# EAGLE board SparkFun-74HC4051-8-Channel-Mux-Breakout_Panel_v10 (EAGLE 7.5.0), part 1 of 6
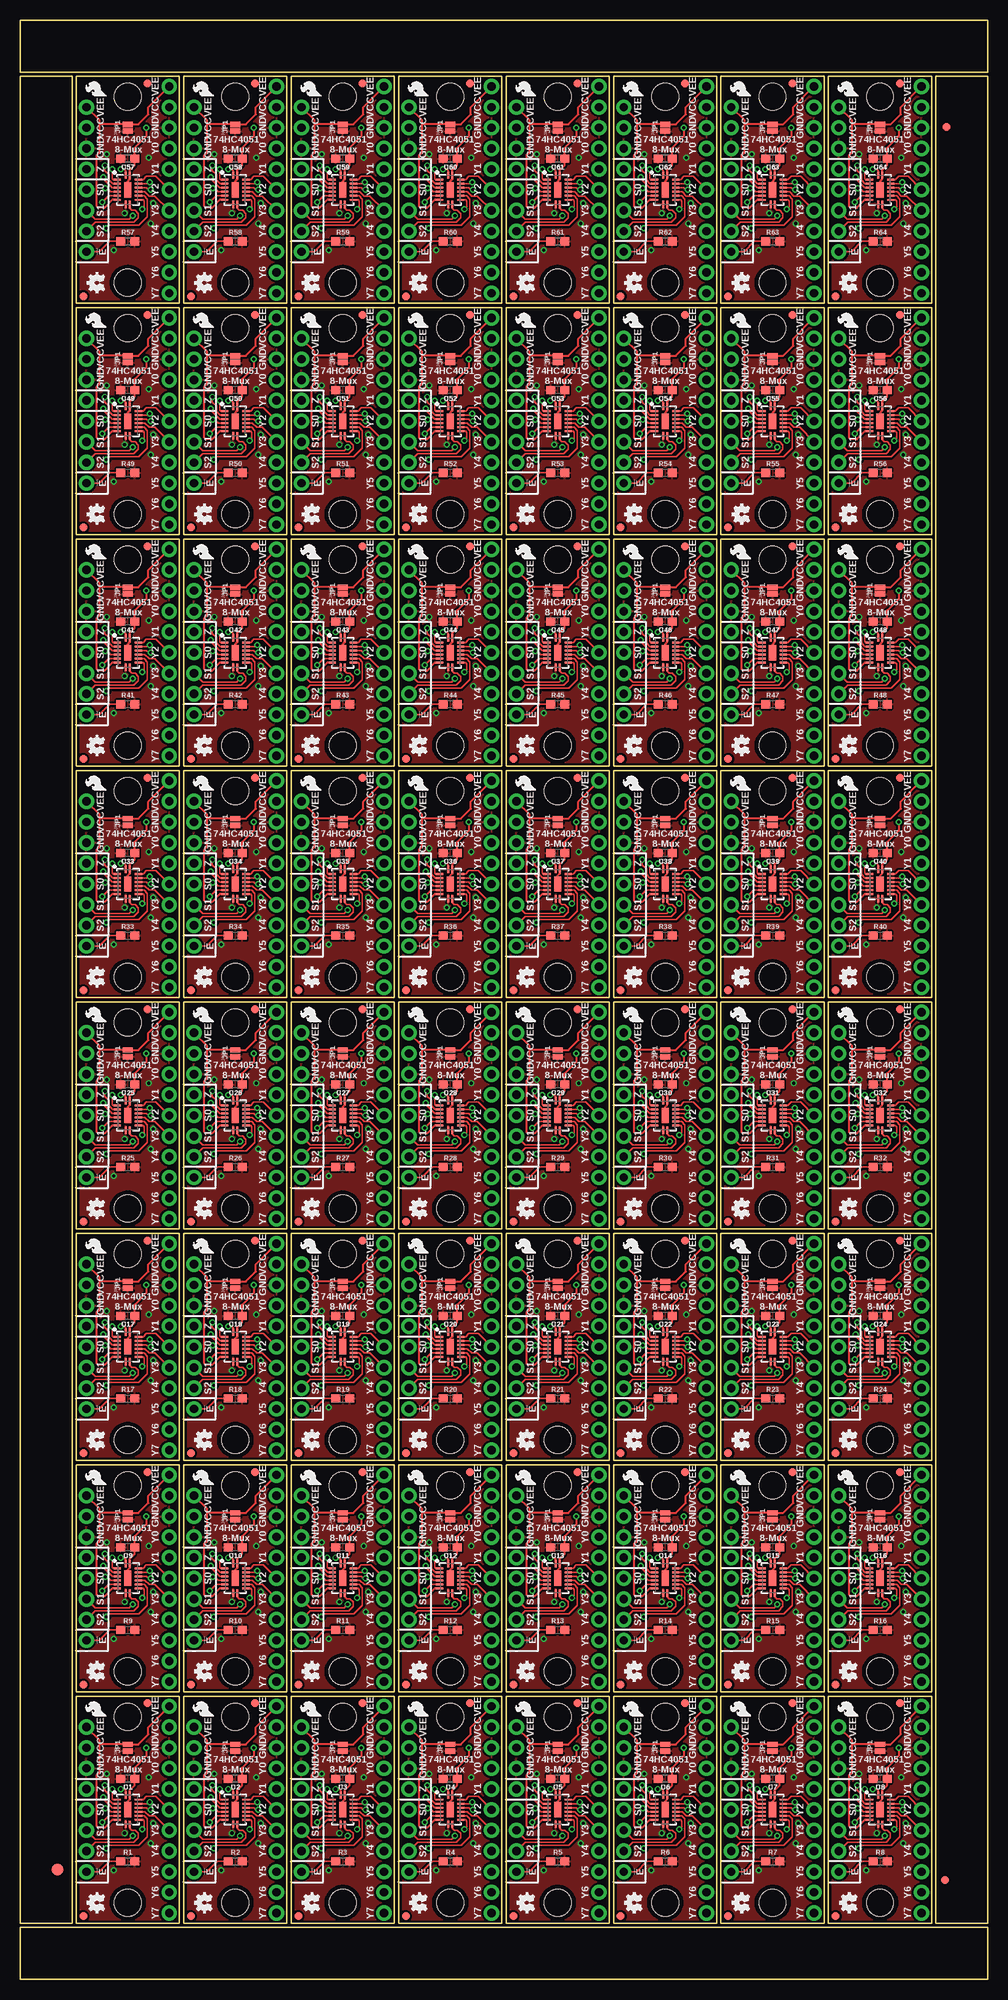
[diagram p0: board, top side]
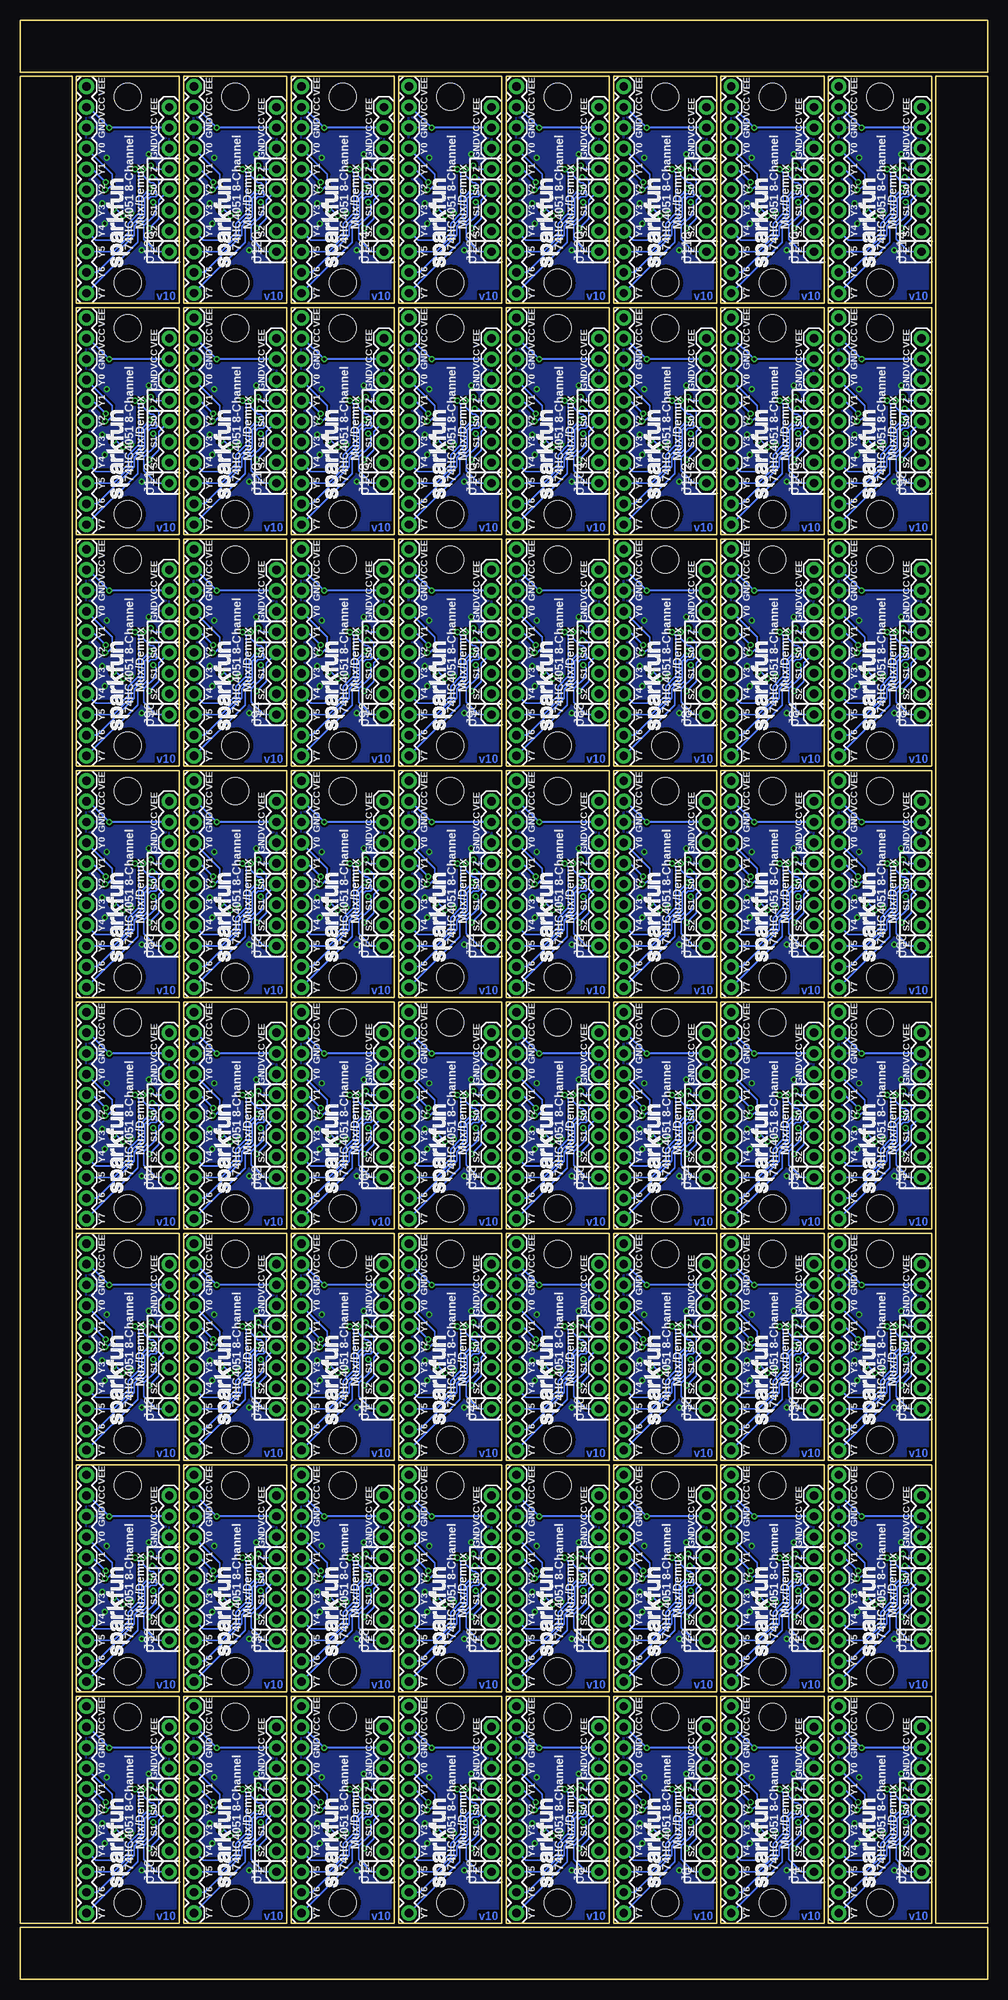
[diagram p1: board, bottom side, seen from below]

Size 118.87 x 240.79 mm. Coordinates in mm from the lower left corner, seen from the top.
Outline: 280 segments
Copper layers (1*16): Top 0.035mm / dielectric 1.5mm / Bottom 0.035mm
Design rules "SparkFun-2-layer-TIGHT": minimum track width 7mil, minimum drill 15mil, track to track 7mil, track to pad 7mil, pad to pad 7mil, via to via 7mil, smd to smd 7mil, copper to edge 7mil, drill to drill 7mil, minimum pad ring 7mil, minimum via ring 7mil, stop-mask expansion 4mil, vias tented up to drill 25mil, thermal gap 10mil

## Footprints (pad centres in the part's own frame; a part is rotated, then mirrored left to right if it is on the bottom)
0603 = smd 1.1 x 1: 1 -0.85,0; 2 0.85,0
FIDUCIAL-1.5X3 = smd 1.5 x 1.5: 1 0,0
FIDUCIAL-1X2 = smd 1 x 1: 1 0,0
STAND-OFF = hole 3.302: 0,0
1X11 = drill 1.016 pad 1.88: 1 0,0; 2 2.54,0; 3 5.08,0; 4 7.62,0; 5 10.16,0; 6 12.7,0; 7 15.24,0; 8 17.78,0; 9 20.32,0; 10 22.86,0; 11 25.4,0
1X08_ROUND = drill 1.016 pad 1.88: 1 0,0; 2 2.54,0; 3 5.08,0; 4 7.62,0; 5 10.16,0; 6 12.7,0; 7 15.24,0; 8 17.78,0
PAD-JUMPER-2-NC_BY_PASTE_NO_SILK = smd 0.635 x 1.27: 1 -0.401,0; 2 0.413,0
DHVQFN-16-2.5X3.5MM = smd 0.9 x 0.24: 1 -1.8,-0.25; 8 1.8,-0.25; 9 1.8,0.25; 16 -1.8,0.25 | smd 0.24 x 0.9: 2 -1.25,-1.3; 3 -0.75,-1.3; 4 -0.25,-1.3; 5 0.25,-1.3; 6 0.75,-1.3; 7 1.25,-1.3; 10 1.25,1.3; 11 0.75,1.3; 12 0.25,1.3; 13 -0.25,1.3; 14 -0.75,1.3; 15 -1.25,1.3 | smd 1.9 x 0.9: EP 0,0

## Placement (x,y rotation side)
C1  0.1uF  [0603]  13.21,24.64 180 top
C2  0.1uF  [0603]  26.42,24.64 180 top
C3  0.1uF  [0603]  39.62,24.64 180 top
C4  0.1uF  [0603]  52.83,24.64 180 top
C5  0.1uF  [0603]  66.04,24.64 180 top
C6  0.1uF  [0603]  79.25,24.64 180 top
C7  0.1uF  [0603]  92.46,24.64 180 top
C8  0.1uF  [0603]  105.66,24.64 180 top
C9  0.1uF  [0603]  13.21,53.09 180 top
C10  0.1uF  [0603]  26.42,53.09 180 top
C11  0.1uF  [0603]  39.62,53.09 180 top
C12  0.1uF  [0603]  52.83,53.09 180 top
C13  0.1uF  [0603]  66.04,53.09 180 top
C14  0.1uF  [0603]  79.25,53.09 180 top
C15  0.1uF  [0603]  92.46,53.09 180 top
C16  0.1uF  [0603]  105.66,53.09 180 top
C17  0.1uF  [0603]  13.21,81.53 180 top
C18  0.1uF  [0603]  26.42,81.53 180 top
C19  0.1uF  [0603]  39.62,81.53 180 top
C20  0.1uF  [0603]  52.83,81.53 180 top
C21  0.1uF  [0603]  66.04,81.53 180 top
C22  0.1uF  [0603]  79.25,81.53 180 top
C23  0.1uF  [0603]  92.46,81.53 180 top
C24  0.1uF  [0603]  105.66,81.53 180 top
C25  0.1uF  [0603]  13.21,109.98 180 top
C26  0.1uF  [0603]  26.42,109.98 180 top
C27  0.1uF  [0603]  39.62,109.98 180 top
C28  0.1uF  [0603]  52.83,109.98 180 top
C29  0.1uF  [0603]  66.04,109.98 180 top
C30  0.1uF  [0603]  79.25,109.98 180 top
C31  0.1uF  [0603]  92.46,109.98 180 top
C32  0.1uF  [0603]  105.66,109.98 180 top
C33  0.1uF  [0603]  13.21,138.43 180 top
C34  0.1uF  [0603]  26.42,138.43 180 top
C35  0.1uF  [0603]  39.62,138.43 180 top
C36  0.1uF  [0603]  52.83,138.43 180 top
C37  0.1uF  [0603]  66.04,138.43 180 top
C38  0.1uF  [0603]  79.25,138.43 180 top
C39  0.1uF  [0603]  92.46,138.43 180 top
C40  0.1uF  [0603]  105.66,138.43 180 top
C41  0.1uF  [0603]  13.21,166.88 180 top
C42  0.1uF  [0603]  26.42,166.88 180 top
C43  0.1uF  [0603]  39.62,166.88 180 top
C44  0.1uF  [0603]  52.83,166.88 180 top
C45  0.1uF  [0603]  66.04,166.88 180 top
C46  0.1uF  [0603]  79.25,166.88 180 top
C47  0.1uF  [0603]  92.46,166.88 180 top
C48  0.1uF  [0603]  105.66,166.88 180 top
C49  0.1uF  [0603]  13.21,195.33 180 top
C50  0.1uF  [0603]  26.42,195.33 180 top
C51  0.1uF  [0603]  39.62,195.33 180 top
C52  0.1uF  [0603]  52.83,195.33 180 top
C53  0.1uF  [0603]  66.04,195.33 180 top
C54  0.1uF  [0603]  79.25,195.33 180 top
C55  0.1uF  [0603]  92.46,195.33 180 top
C56  0.1uF  [0603]  105.66,195.33 180 top
C57  0.1uF  [0603]  13.21,223.77 180 top
C58  0.1uF  [0603]  26.42,223.77 180 top
C59  0.1uF  [0603]  39.62,223.77 180 top
C60  0.1uF  [0603]  52.83,223.77 180 top
C61  0.1uF  [0603]  66.04,223.77 180 top
C62  0.1uF  [0603]  79.25,223.77 180 top
C63  0.1uF  [0603]  92.46,223.77 180 top
C64  0.1uF  [0603]  105.66,223.77 180 top
E$1  [FIDUCIAL-1.5X3]  4.57,13.46 0 top
E$5  [FIDUCIAL-1X2]  113.67,12.19 0 top
E$7  [FIDUCIAL-1X2]  113.79,227.71 90 top
FD1  FIDUCIAL1X2  [FIDUCIAL-1X2]  7.75,7.75 0 top
FD2  FIDUCIAL1X2  [FIDUCIAL-1X2]  15.62,33.91 0 top
FD3  FIDUCIAL1X2  [FIDUCIAL-1X2]  20.95,7.75 0 top
FD4  FIDUCIAL1X2  [FIDUCIAL-1X2]  28.83,33.91 0 top
FD5  FIDUCIAL1X2  [FIDUCIAL-1X2]  34.16,7.75 0 top
FD6  FIDUCIAL1X2  [FIDUCIAL-1X2]  42.04,33.91 0 top
FD7  FIDUCIAL1X2  [FIDUCIAL-1X2]  47.37,7.75 0 top
FD8  FIDUCIAL1X2  [FIDUCIAL-1X2]  55.24,33.91 0 top
FD9  FIDUCIAL1X2  [FIDUCIAL-1X2]  60.58,7.75 0 top
FD10  FIDUCIAL1X2  [FIDUCIAL-1X2]  68.45,33.91 0 top
FD11  FIDUCIAL1X2  [FIDUCIAL-1X2]  73.79,7.75 0 top
FD12  FIDUCIAL1X2  [FIDUCIAL-1X2]  81.66,33.91 0 top
FD13  FIDUCIAL1X2  [FIDUCIAL-1X2]  87,7.75 0 top
FD14  FIDUCIAL1X2  [FIDUCIAL-1X2]  94.87,33.91 0 top
FD15  FIDUCIAL1X2  [FIDUCIAL-1X2]  100.2,7.75 0 top
FD16  FIDUCIAL1X2  [FIDUCIAL-1X2]  108.08,33.91 0 top
FD17  FIDUCIAL1X2  [FIDUCIAL-1X2]  7.75,36.2 0 top
FD18  FIDUCIAL1X2  [FIDUCIAL-1X2]  15.62,62.36 0 top
FD19  FIDUCIAL1X2  [FIDUCIAL-1X2]  20.95,36.2 0 top
FD20  FIDUCIAL1X2  [FIDUCIAL-1X2]  28.83,62.36 0 top
FD21  FIDUCIAL1X2  [FIDUCIAL-1X2]  34.16,36.2 0 top
FD22  FIDUCIAL1X2  [FIDUCIAL-1X2]  42.04,62.36 0 top
FD23  FIDUCIAL1X2  [FIDUCIAL-1X2]  47.37,36.2 0 top
FD24  FIDUCIAL1X2  [FIDUCIAL-1X2]  55.24,62.36 0 top
FD25  FIDUCIAL1X2  [FIDUCIAL-1X2]  60.58,36.2 0 top
FD26  FIDUCIAL1X2  [FIDUCIAL-1X2]  68.45,62.36 0 top
FD27  FIDUCIAL1X2  [FIDUCIAL-1X2]  73.79,36.2 0 top
FD28  FIDUCIAL1X2  [FIDUCIAL-1X2]  81.66,62.36 0 top
FD29  FIDUCIAL1X2  [FIDUCIAL-1X2]  87,36.2 0 top
FD30  FIDUCIAL1X2  [FIDUCIAL-1X2]  94.87,62.36 0 top
FD31  FIDUCIAL1X2  [FIDUCIAL-1X2]  100.2,36.2 0 top
FD32  FIDUCIAL1X2  [FIDUCIAL-1X2]  108.08,62.36 0 top
FD33  FIDUCIAL1X2  [FIDUCIAL-1X2]  7.75,64.64 0 top
FD34  FIDUCIAL1X2  [FIDUCIAL-1X2]  15.62,90.81 0 top
FD35  FIDUCIAL1X2  [FIDUCIAL-1X2]  20.95,64.64 0 top
FD36  FIDUCIAL1X2  [FIDUCIAL-1X2]  28.83,90.81 0 top
FD37  FIDUCIAL1X2  [FIDUCIAL-1X2]  34.16,64.64 0 top
FD38  FIDUCIAL1X2  [FIDUCIAL-1X2]  42.04,90.81 0 top
FD39  FIDUCIAL1X2  [FIDUCIAL-1X2]  47.37,64.64 0 top
FD40  FIDUCIAL1X2  [FIDUCIAL-1X2]  55.24,90.81 0 top
FD41  FIDUCIAL1X2  [FIDUCIAL-1X2]  60.58,64.64 0 top
FD42  FIDUCIAL1X2  [FIDUCIAL-1X2]  68.45,90.81 0 top
FD43  FIDUCIAL1X2  [FIDUCIAL-1X2]  73.79,64.64 0 top
FD44  FIDUCIAL1X2  [FIDUCIAL-1X2]  81.66,90.81 0 top
FD45  FIDUCIAL1X2  [FIDUCIAL-1X2]  87,64.64 0 top
FD46  FIDUCIAL1X2  [FIDUCIAL-1X2]  94.87,90.81 0 top
FD47  FIDUCIAL1X2  [FIDUCIAL-1X2]  100.2,64.64 0 top
FD48  FIDUCIAL1X2  [FIDUCIAL-1X2]  108.08,90.81 0 top
FD49  FIDUCIAL1X2  [FIDUCIAL-1X2]  7.75,93.09 0 top
FD50  FIDUCIAL1X2  [FIDUCIAL-1X2]  15.62,119.25 0 top
FD51  FIDUCIAL1X2  [FIDUCIAL-1X2]  20.95,93.09 0 top
FD52  FIDUCIAL1X2  [FIDUCIAL-1X2]  28.83,119.25 0 top
FD53  FIDUCIAL1X2  [FIDUCIAL-1X2]  34.16,93.09 0 top
FD54  FIDUCIAL1X2  [FIDUCIAL-1X2]  42.04,119.25 0 top
FD55  FIDUCIAL1X2  [FIDUCIAL-1X2]  47.37,93.09 0 top
FD56  FIDUCIAL1X2  [FIDUCIAL-1X2]  55.24,119.25 0 top
FD57  FIDUCIAL1X2  [FIDUCIAL-1X2]  60.58,93.09 0 top
FD58  FIDUCIAL1X2  [FIDUCIAL-1X2]  68.45,119.25 0 top
FD59  FIDUCIAL1X2  [FIDUCIAL-1X2]  73.79,93.09 0 top
FD60  FIDUCIAL1X2  [FIDUCIAL-1X2]  81.66,119.25 0 top
FD61  FIDUCIAL1X2  [FIDUCIAL-1X2]  87,93.09 0 top
FD62  FIDUCIAL1X2  [FIDUCIAL-1X2]  94.87,119.25 0 top
FD63  FIDUCIAL1X2  [FIDUCIAL-1X2]  100.2,93.09 0 top
FD64  FIDUCIAL1X2  [FIDUCIAL-1X2]  108.08,119.25 0 top
FD65  FIDUCIAL1X2  [FIDUCIAL-1X2]  7.75,121.54 0 top
FD66  FIDUCIAL1X2  [FIDUCIAL-1X2]  15.62,147.7 0 top
FD67  FIDUCIAL1X2  [FIDUCIAL-1X2]  20.95,121.54 0 top
FD68  FIDUCIAL1X2  [FIDUCIAL-1X2]  28.83,147.7 0 top
FD69  FIDUCIAL1X2  [FIDUCIAL-1X2]  34.16,121.54 0 top
FD70  FIDUCIAL1X2  [FIDUCIAL-1X2]  42.04,147.7 0 top
FD71  FIDUCIAL1X2  [FIDUCIAL-1X2]  47.37,121.54 0 top
FD72  FIDUCIAL1X2  [FIDUCIAL-1X2]  55.24,147.7 0 top
FD73  FIDUCIAL1X2  [FIDUCIAL-1X2]  60.58,121.54 0 top
FD74  FIDUCIAL1X2  [FIDUCIAL-1X2]  68.45,147.7 0 top
FD75  FIDUCIAL1X2  [FIDUCIAL-1X2]  73.79,121.54 0 top
FD76  FIDUCIAL1X2  [FIDUCIAL-1X2]  81.66,147.7 0 top
FD77  FIDUCIAL1X2  [FIDUCIAL-1X2]  87,121.54 0 top
FD78  FIDUCIAL1X2  [FIDUCIAL-1X2]  94.87,147.7 0 top
FD79  FIDUCIAL1X2  [FIDUCIAL-1X2]  100.2,121.54 0 top
FD80  FIDUCIAL1X2  [FIDUCIAL-1X2]  108.08,147.7 0 top
FD81  FIDUCIAL1X2  [FIDUCIAL-1X2]  7.75,149.99 0 top
FD82  FIDUCIAL1X2  [FIDUCIAL-1X2]  15.62,176.15 0 top
FD83  FIDUCIAL1X2  [FIDUCIAL-1X2]  20.95,149.99 0 top
FD84  FIDUCIAL1X2  [FIDUCIAL-1X2]  28.83,176.15 0 top
FD85  FIDUCIAL1X2  [FIDUCIAL-1X2]  34.16,149.99 0 top
FD86  FIDUCIAL1X2  [FIDUCIAL-1X2]  42.04,176.15 0 top
FD87  FIDUCIAL1X2  [FIDUCIAL-1X2]  47.37,149.99 0 top
FD88  FIDUCIAL1X2  [FIDUCIAL-1X2]  55.24,176.15 0 top
FD89  FIDUCIAL1X2  [FIDUCIAL-1X2]  60.58,149.99 0 top
FD90  FIDUCIAL1X2  [FIDUCIAL-1X2]  68.45,176.15 0 top
FD91  FIDUCIAL1X2  [FIDUCIAL-1X2]  73.79,149.99 0 top
FD92  FIDUCIAL1X2  [FIDUCIAL-1X2]  81.66,176.15 0 top
FD93  FIDUCIAL1X2  [FIDUCIAL-1X2]  87,149.99 0 top
FD94  FIDUCIAL1X2  [FIDUCIAL-1X2]  94.87,176.15 0 top
FD95  FIDUCIAL1X2  [FIDUCIAL-1X2]  100.2,149.99 0 top
FD96  FIDUCIAL1X2  [FIDUCIAL-1X2]  108.08,176.15 0 top
FD97  FIDUCIAL1X2  [FIDUCIAL-1X2]  7.75,178.44 0 top
FD98  FIDUCIAL1X2  [FIDUCIAL-1X2]  15.62,204.6 0 top
FD99  FIDUCIAL1X2  [FIDUCIAL-1X2]  20.95,178.44 0 top
FD100  FIDUCIAL1X2  [FIDUCIAL-1X2]  28.83,204.6 0 top
FD101  FIDUCIAL1X2  [FIDUCIAL-1X2]  34.16,178.44 0 top
FD102  FIDUCIAL1X2  [FIDUCIAL-1X2]  42.04,204.6 0 top
FD103  FIDUCIAL1X2  [FIDUCIAL-1X2]  47.37,178.44 0 top
FD104  FIDUCIAL1X2  [FIDUCIAL-1X2]  55.24,204.6 0 top
FD105  FIDUCIAL1X2  [FIDUCIAL-1X2]  60.58,178.44 0 top
FD106  FIDUCIAL1X2  [FIDUCIAL-1X2]  68.45,204.6 0 top
FD107  FIDUCIAL1X2  [FIDUCIAL-1X2]  73.79,178.44 0 top
FD108  FIDUCIAL1X2  [FIDUCIAL-1X2]  81.66,204.6 0 top
FD109  FIDUCIAL1X2  [FIDUCIAL-1X2]  87,178.44 0 top
FD110  FIDUCIAL1X2  [FIDUCIAL-1X2]  94.87,204.6 0 top
FD111  FIDUCIAL1X2  [FIDUCIAL-1X2]  100.2,178.44 0 top
FD112  FIDUCIAL1X2  [FIDUCIAL-1X2]  108.08,204.6 0 top
FD113  FIDUCIAL1X2  [FIDUCIAL-1X2]  7.75,206.88 0 top
FD114  FIDUCIAL1X2  [FIDUCIAL-1X2]  15.62,233.04 0 top
FD115  FIDUCIAL1X2  [FIDUCIAL-1X2]  20.95,206.88 0 top
FD116  FIDUCIAL1X2  [FIDUCIAL-1X2]  28.83,233.04 0 top
FD117  FIDUCIAL1X2  [FIDUCIAL-1X2]  34.16,206.88 0 top
FD118  FIDUCIAL1X2  [FIDUCIAL-1X2]  42.04,233.04 0 top
FD119  FIDUCIAL1X2  [FIDUCIAL-1X2]  47.37,206.88 0 top
FD120  FIDUCIAL1X2  [FIDUCIAL-1X2]  55.24,233.04 0 top
FD121  FIDUCIAL1X2  [FIDUCIAL-1X2]  60.58,206.88 0 top
FD122  FIDUCIAL1X2  [FIDUCIAL-1X2]  68.45,233.04 0 top
FD123  FIDUCIAL1X2  [FIDUCIAL-1X2]  73.79,206.88 0 top
FD124  FIDUCIAL1X2  [FIDUCIAL-1X2]  81.66,233.04 0 top
FD125  FIDUCIAL1X2  [FIDUCIAL-1X2]  87,206.88 0 top
FD126  FIDUCIAL1X2  [FIDUCIAL-1X2]  94.87,233.04 0 top
FD127  FIDUCIAL1X2  [FIDUCIAL-1X2]  100.2,206.88 0 top
FD128  FIDUCIAL1X2  [FIDUCIAL-1X2]  108.08,233.04 0 top
H1  STAND-OFF  [STAND-OFF]  13.21,32.26 0 top
H2  STAND-OFF  [STAND-OFF]  13.21,9.4 0 top
H3  STAND-OFF  [STAND-OFF]  26.42,32.26 0 top
H4  STAND-OFF  [STAND-OFF]  26.42,9.4 0 top
H5  STAND-OFF  [STAND-OFF]  39.62,32.26 0 top
H6  STAND-OFF  [STAND-OFF]  39.62,9.4 0 top
H7  STAND-OFF  [STAND-OFF]  52.83,32.26 0 top
H8  STAND-OFF  [STAND-OFF]  52.83,9.4 0 top
H9  STAND-OFF  [STAND-OFF]  66.04,32.26 0 top
H10  STAND-OFF  [STAND-OFF]  66.04,9.4 0 top
H11  STAND-OFF  [STAND-OFF]  79.25,32.26 0 top
H12  STAND-OFF  [STAND-OFF]  79.25,9.4 0 top
H13  STAND-OFF  [STAND-OFF]  92.46,32.26 0 top
H14  STAND-OFF  [STAND-OFF]  92.46,9.4 0 top
H15  STAND-OFF  [STAND-OFF]  105.66,32.26 0 top
H16  STAND-OFF  [STAND-OFF]  105.66,9.4 0 top
H17  STAND-OFF  [STAND-OFF]  13.21,60.71 0 top
H18  STAND-OFF  [STAND-OFF]  13.21,37.85 0 top
H19  STAND-OFF  [STAND-OFF]  26.42,60.71 0 top
H20  STAND-OFF  [STAND-OFF]  26.42,37.85 0 top
H21  STAND-OFF  [STAND-OFF]  39.62,60.71 0 top
H22  STAND-OFF  [STAND-OFF]  39.62,37.85 0 top
H23  STAND-OFF  [STAND-OFF]  52.83,60.71 0 top
H24  STAND-OFF  [STAND-OFF]  52.83,37.85 0 top
H25  STAND-OFF  [STAND-OFF]  66.04,60.71 0 top
H26  STAND-OFF  [STAND-OFF]  66.04,37.85 0 top
H27  STAND-OFF  [STAND-OFF]  79.25,60.71 0 top
H28  STAND-OFF  [STAND-OFF]  79.25,37.85 0 top
H29  STAND-OFF  [STAND-OFF]  92.46,60.71 0 top
H30  STAND-OFF  [STAND-OFF]  92.46,37.85 0 top
H31  STAND-OFF  [STAND-OFF]  105.66,60.71 0 top
H32  STAND-OFF  [STAND-OFF]  105.66,37.85 0 top
H33  STAND-OFF  [STAND-OFF]  13.21,89.15 0 top
H34  STAND-OFF  [STAND-OFF]  13.21,66.29 0 top
H35  STAND-OFF  [STAND-OFF]  26.42,89.15 0 top
H36  STAND-OFF  [STAND-OFF]  26.42,66.29 0 top
H37  STAND-OFF  [STAND-OFF]  39.62,89.15 0 top
H38  STAND-OFF  [STAND-OFF]  39.62,66.29 0 top
H39  STAND-OFF  [STAND-OFF]  52.83,89.15 0 top
H40  STAND-OFF  [STAND-OFF]  52.83,66.29 0 top
H41  STAND-OFF  [STAND-OFF]  66.04,89.15 0 top
H42  STAND-OFF  [STAND-OFF]  66.04,66.29 0 top
H43  STAND-OFF  [STAND-OFF]  79.25,89.15 0 top
H44  STAND-OFF  [STAND-OFF]  79.25,66.29 0 top
H45  STAND-OFF  [STAND-OFF]  92.46,89.15 0 top
H46  STAND-OFF  [STAND-OFF]  92.46,66.29 0 top
H47  STAND-OFF  [STAND-OFF]  105.66,89.15 0 top
H48  STAND-OFF  [STAND-OFF]  105.66,66.29 0 top
H49  STAND-OFF  [STAND-OFF]  13.21,117.6 0 top
H50  STAND-OFF  [STAND-OFF]  13.21,94.74 0 top
H51  STAND-OFF  [STAND-OFF]  26.42,117.6 0 top
H52  STAND-OFF  [STAND-OFF]  26.42,94.74 0 top
H53  STAND-OFF  [STAND-OFF]  39.62,117.6 0 top
H54  STAND-OFF  [STAND-OFF]  39.62,94.74 0 top
H55  STAND-OFF  [STAND-OFF]  52.83,117.6 0 top
H56  STAND-OFF  [STAND-OFF]  52.83,94.74 0 top
H57  STAND-OFF  [STAND-OFF]  66.04,117.6 0 top
H58  STAND-OFF  [STAND-OFF]  66.04,94.74 0 top
H59  STAND-OFF  [STAND-OFF]  79.25,117.6 0 top
H60  STAND-OFF  [STAND-OFF]  79.25,94.74 0 top
H61  STAND-OFF  [STAND-OFF]  92.46,117.6 0 top
H62  STAND-OFF  [STAND-OFF]  92.46,94.74 0 top
H63  STAND-OFF  [STAND-OFF]  105.66,117.6 0 top
H64  STAND-OFF  [STAND-OFF]  105.66,94.74 0 top
H65  STAND-OFF  [STAND-OFF]  13.21,146.05 0 top
H66  STAND-OFF  [STAND-OFF]  13.21,123.19 0 top
H67  STAND-OFF  [STAND-OFF]  26.42,146.05 0 top
H68  STAND-OFF  [STAND-OFF]  26.42,123.19 0 top
H69  STAND-OFF  [STAND-OFF]  39.62,146.05 0 top
H70  STAND-OFF  [STAND-OFF]  39.62,123.19 0 top
H71  STAND-OFF  [STAND-OFF]  52.83,146.05 0 top
H72  STAND-OFF  [STAND-OFF]  52.83,123.19 0 top
H73  STAND-OFF  [STAND-OFF]  66.04,146.05 0 top
H74  STAND-OFF  [STAND-OFF]  66.04,123.19 0 top
H75  STAND-OFF  [STAND-OFF]  79.25,146.05 0 top
H76  STAND-OFF  [STAND-OFF]  79.25,123.19 0 top
H77  STAND-OFF  [STAND-OFF]  92.46,146.05 0 top
H78  STAND-OFF  [STAND-OFF]  92.46,123.19 0 top
H79  STAND-OFF  [STAND-OFF]  105.66,146.05 0 top
H80  STAND-OFF  [STAND-OFF]  105.66,123.19 0 top
H81  STAND-OFF  [STAND-OFF]  13.21,174.5 0 top
H82  STAND-OFF  [STAND-OFF]  13.21,151.64 0 top
H83  STAND-OFF  [STAND-OFF]  26.42,174.5 0 top
H84  STAND-OFF  [STAND-OFF]  26.42,151.64 0 top
H85  STAND-OFF  [STAND-OFF]  39.62,174.5 0 top
H86  STAND-OFF  [STAND-OFF]  39.62,151.64 0 top
H87  STAND-OFF  [STAND-OFF]  52.83,174.5 0 top
H88  STAND-OFF  [STAND-OFF]  52.83,151.64 0 top
H89  STAND-OFF  [STAND-OFF]  66.04,174.5 0 top
H90  STAND-OFF  [STAND-OFF]  66.04,151.64 0 top
H91  STAND-OFF  [STAND-OFF]  79.25,174.5 0 top
H92  STAND-OFF  [STAND-OFF]  79.25,151.64 0 top
H93  STAND-OFF  [STAND-OFF]  92.46,174.5 0 top
H94  STAND-OFF  [STAND-OFF]  92.46,151.64 0 top
H95  STAND-OFF  [STAND-OFF]  105.66,174.5 0 top
H96  STAND-OFF  [STAND-OFF]  105.66,151.64 0 top
H97  STAND-OFF  [STAND-OFF]  13.21,202.95 0 top
H98  STAND-OFF  [STAND-OFF]  13.21,180.09 0 top
H99  STAND-OFF  [STAND-OFF]  26.42,202.95 0 top
H100  STAND-OFF  [STAND-OFF]  26.42,180.09 0 top
H101  STAND-OFF  [STAND-OFF]  39.62,202.95 0 top
H102  STAND-OFF  [STAND-OFF]  39.62,180.09 0 top
H103  STAND-OFF  [STAND-OFF]  52.83,202.95 0 top
H104  STAND-OFF  [STAND-OFF]  52.83,180.09 0 top
H105  STAND-OFF  [STAND-OFF]  66.04,202.95 0 top
H106  STAND-OFF  [STAND-OFF]  66.04,180.09 0 top
H107  STAND-OFF  [STAND-OFF]  79.25,202.95 0 top
H108  STAND-OFF  [STAND-OFF]  79.25,180.09 0 top
H109  STAND-OFF  [STAND-OFF]  92.46,202.95 0 top
H110  STAND-OFF  [STAND-OFF]  92.46,180.09 0 top
H111  STAND-OFF  [STAND-OFF]  105.66,202.95 0 top
H112  STAND-OFF  [STAND-OFF]  105.66,180.09 0 top
H113  STAND-OFF  [STAND-OFF]  13.21,231.39 0 top
H114  STAND-OFF  [STAND-OFF]  13.21,208.53 0 top
H115  STAND-OFF  [STAND-OFF]  26.42,231.39 0 top
H116  STAND-OFF  [STAND-OFF]  26.42,208.53 0 top
H117  STAND-OFF  [STAND-OFF]  39.62,231.39 0 top
H118  STAND-OFF  [STAND-OFF]  39.62,208.53 0 top
H119  STAND-OFF  [STAND-OFF]  52.83,231.39 0 top
H120  STAND-OFF  [STAND-OFF]  52.83,208.53 0 top
H121  STAND-OFF  [STAND-OFF]  66.04,231.39 0 top
H122  STAND-OFF  [STAND-OFF]  66.04,208.53 0 top
H123  STAND-OFF  [STAND-OFF]  79.25,231.39 0 top
H124  STAND-OFF  [STAND-OFF]  79.25,208.53 0 top
H125  STAND-OFF  [STAND-OFF]  92.46,231.39 0 top
H126  STAND-OFF  [STAND-OFF]  92.46,208.53 0 top
H127  STAND-OFF  [STAND-OFF]  105.66,231.39 0 top
H128  STAND-OFF  [STAND-OFF]  105.66,208.53 0 top
J1  [1X11]  18.29,8.13 90 bottom
J2  [1X08_ROUND]  8.13,13.21 90 bottom
J3  [1X11]  31.5,8.13 90 bottom
J4  [1X08_ROUND]  21.34,13.21 90 bottom
J5  [1X11]  44.7,8.13 90 bottom
J6  [1X08_ROUND]  34.54,13.21 90 bottom
J7  [1X11]  57.91,8.13 90 bottom
J8  [1X08_ROUND]  47.75,13.21 90 bottom
J9  [1X11]  71.12,8.13 90 bottom
J10  [1X08_ROUND]  60.96,13.21 90 bottom
J11  [1X11]  84.33,8.13 90 bottom
J12  [1X08_ROUND]  74.17,13.21 90 bottom
J13  [1X11]  97.54,8.13 90 bottom
J14  [1X08_ROUND]  87.38,13.21 90 bottom
J15  [1X11]  110.74,8.13 90 bottom
J16  [1X08_ROUND]  100.58,13.21 90 bottom
J17  [1X11]  18.29,36.58 90 bottom
J18  [1X08_ROUND]  8.13,41.66 90 bottom
J19  [1X11]  31.5,36.58 90 bottom
J20  [1X08_ROUND]  21.34,41.66 90 bottom
J21  [1X11]  44.7,36.58 90 bottom
J22  [1X08_ROUND]  34.54,41.66 90 bottom
J23  [1X11]  57.91,36.58 90 bottom
J24  [1X08_ROUND]  47.75,41.66 90 bottom
J25  [1X11]  71.12,36.58 90 bottom
J26  [1X08_ROUND]  60.96,41.66 90 bottom
J27  [1X11]  84.33,36.58 90 bottom
J28  [1X08_ROUND]  74.17,41.66 90 bottom
J29  [1X11]  97.54,36.58 90 bottom
J30  [1X08_ROUND]  87.38,41.66 90 bottom
J31  [1X11]  110.74,36.58 90 bottom
J32  [1X08_ROUND]  100.58,41.66 90 bottom
J33  [1X11]  18.29,65.02 90 bottom
J34  [1X08_ROUND]  8.13,70.1 90 bottom
J35  [1X11]  31.5,65.02 90 bottom
J36  [1X08_ROUND]  21.34,70.1 90 bottom
J37  [1X11]  44.7,65.02 90 bottom
J38  [1X08_ROUND]  34.54,70.1 90 bottom
J39  [1X11]  57.91,65.02 90 bottom
J40  [1X08_ROUND]  47.75,70.1 90 bottom
J41  [1X11]  71.12,65.02 90 bottom
J42  [1X08_ROUND]  60.96,70.1 90 bottom
J43  [1X11]  84.33,65.02 90 bottom
J44  [1X08_ROUND]  74.17,70.1 90 bottom
J45  [1X11]  97.54,65.02 90 bottom
J46  [1X08_ROUND]  87.38,70.1 90 bottom
J47  [1X11]  110.74,65.02 90 bottom
J48  [1X08_ROUND]  100.58,70.1 90 bottom
J49  [1X11]  18.29,93.47 90 bottom
J50  [1X08_ROUND]  8.13,98.55 90 bottom
J51  [1X11]  31.5,93.47 90 bottom
J52  [1X08_ROUND]  21.34,98.55 90 bottom
J53  [1X11]  44.7,93.47 90 bottom
J54  [1X08_ROUND]  34.54,98.55 90 bottom
J55  [1X11]  57.91,93.47 90 bottom
J56  [1X08_ROUND]  47.75,98.55 90 bottom
J57  [1X11]  71.12,93.47 90 bottom
J58  [1X08_ROUND]  60.96,98.55 90 bottom
J59  [1X11]  84.33,93.47 90 bottom
J60  [1X08_ROUND]  74.17,98.55 90 bottom
J61  [1X11]  97.54,93.47 90 bottom
J62  [1X08_ROUND]  87.38,98.55 90 bottom
J63  [1X11]  110.74,93.47 90 bottom
J64  [1X08_ROUND]  100.58,98.55 90 bottom
J65  [1X11]  18.29,121.92 90 bottom
J66  [1X08_ROUND]  8.13,127 90 bottom
J67  [1X11]  31.5,121.92 90 bottom
J68  [1X08_ROUND]  21.34,127 90 bottom
J69  [1X11]  44.7,121.92 90 bottom
J70  [1X08_ROUND]  34.54,127 90 bottom
J71  [1X11]  57.91,121.92 90 bottom
J72  [1X08_ROUND]  47.75,127 90 bottom
J73  [1X11]  71.12,121.92 90 bottom
J74  [1X08_ROUND]  60.96,127 90 bottom
J75  [1X11]  84.33,121.92 90 bottom
J76  [1X08_ROUND]  74.17,127 90 bottom
J77  [1X11]  97.54,121.92 90 bottom
J78  [1X08_ROUND]  87.38,127 90 bottom
J79  [1X11]  110.74,121.92 90 bottom
J80  [1X08_ROUND]  100.58,127 90 bottom
J81  [1X11]  18.29,150.37 90 bottom
J82  [1X08_ROUND]  8.13,155.45 90 bottom
J83  [1X11]  31.5,150.37 90 bottom
J84  [1X08_ROUND]  21.34,155.45 90 bottom
J85  [1X11]  44.7,150.37 90 bottom
J86  [1X08_ROUND]  34.54,155.45 90 bottom
J87  [1X11]  57.91,150.37 90 bottom
J88  [1X08_ROUND]  47.75,155.45 90 bottom
J89  [1X11]  71.12,150.37 90 bottom
J90  [1X08_ROUND]  60.96,155.45 90 bottom
J91  [1X11]  84.33,150.37 90 bottom
J92  [1X08_ROUND]  74.17,155.45 90 bottom
J93  [1X11]  97.54,150.37 90 bottom
J94  [1X08_ROUND]  87.38,155.45 90 bottom
J95  [1X11]  110.74,150.37 90 bottom
J96  [1X08_ROUND]  100.58,155.45 90 bottom
J97  [1X11]  18.29,178.82 90 bottom
J98  [1X08_ROUND]  8.13,183.9 90 bottom
J99  [1X11]  31.5,178.82 90 bottom
J100  [1X08_ROUND]  21.34,183.9 90 bottom
J101  [1X11]  44.7,178.82 90 bottom
J102  [1X08_ROUND]  34.54,183.9 90 bottom
J103  [1X11]  57.91,178.82 90 bottom
J104  [1X08_ROUND]  47.75,183.9 90 bottom
J105  [1X11]  71.12,178.82 90 bottom
J106  [1X08_ROUND]  60.96,183.9 90 bottom
J107  [1X11]  84.33,178.82 90 bottom
J108  [1X08_ROUND]  74.17,183.9 90 bottom
J109  [1X11]  97.54,178.82 90 bottom
J110  [1X08_ROUND]  87.38,183.9 90 bottom
J111  [1X11]  110.74,178.82 90 bottom
J112  [1X08_ROUND]  100.58,183.9 90 bottom
J113  [1X11]  18.29,207.26 90 bottom
J114  [1X08_ROUND]  8.13,212.34 90 bottom
J115  [1X11]  31.5,207.26 90 bottom
J116  [1X08_ROUND]  21.34,212.34 90 bottom
J117  [1X11]  44.7,207.26 90 bottom
J118  [1X08_ROUND]  34.54,212.34 90 bottom
J119  [1X11]  57.91,207.26 90 bottom
J120  [1X08_ROUND]  47.75,212.34 90 bottom
J121  [1X11]  71.12,207.26 90 bottom
J122  [1X08_ROUND]  60.96,212.34 90 bottom
J123  [1X11]  84.33,207.26 90 bottom
J124  [1X08_ROUND]  74.17,212.34 90 bottom
J125  [1X11]  97.54,207.26 90 bottom
J126  [1X08_ROUND]  87.38,212.34 90 bottom
J127  [1X11]  110.74,207.26 90 bottom
J128  [1X08_ROUND]  100.58,212.34 90 bottom
JP1  VEE-GND  [PAD-JUMPER-2-NC_BY_PASTE_NO_SILK]  13.21,28.45 90 top
JP2  VEE-GND  [PAD-JUMPER-2-NC_BY_PASTE_NO_SILK]  26.42,28.45 90 top
JP3  VEE-GND  [PAD-JUMPER-2-NC_BY_PASTE_NO_SILK]  39.62,28.45 90 top
JP4  VEE-GND  [PAD-JUMPER-2-NC_BY_PASTE_NO_SILK]  52.83,28.45 90 top
JP5  VEE-GND  [PAD-JUMPER-2-NC_BY_PASTE_NO_SILK]  66.04,28.45 90 top
JP6  VEE-GND  [PAD-JUMPER-2-NC_BY_PASTE_NO_SILK]  79.25,28.45 90 top
JP7  VEE-GND  [PAD-JUMPER-2-NC_BY_PASTE_NO_SILK]  92.46,28.45 90 top
JP8  VEE-GND  [PAD-JUMPER-2-NC_BY_PASTE_NO_SILK]  105.66,28.45 90 top
JP9  VEE-GND  [PAD-JUMPER-2-NC_BY_PASTE_NO_SILK]  13.21,56.9 90 top
JP10  VEE-GND  [PAD-JUMPER-2-NC_BY_PASTE_NO_SILK]  26.42,56.9 90 top
JP11  VEE-GND  [PAD-JUMPER-2-NC_BY_PASTE_NO_SILK]  39.62,56.9 90 top
JP12  VEE-GND  [PAD-JUMPER-2-NC_BY_PASTE_NO_SILK]  52.83,56.9 90 top
JP13  VEE-GND  [PAD-JUMPER-2-NC_BY_PASTE_NO_SILK]  66.04,56.9 90 top
JP14  VEE-GND  [PAD-JUMPER-2-NC_BY_PASTE_NO_SILK]  79.25,56.9 90 top
JP15  VEE-GND  [PAD-JUMPER-2-NC_BY_PASTE_NO_SILK]  92.46,56.9 90 top
JP16  VEE-GND  [PAD-JUMPER-2-NC_BY_PASTE_NO_SILK]  105.66,56.9 90 top
JP17  VEE-GND  [PAD-JUMPER-2-NC_BY_PASTE_NO_SILK]  13.21,85.34 90 top
JP18  VEE-GND  [PAD-JUMPER-2-NC_BY_PASTE_NO_SILK]  26.42,85.34 90 top
JP19  VEE-GND  [PAD-JUMPER-2-NC_BY_PASTE_NO_SILK]  39.62,85.34 90 top
JP20  VEE-GND  [PAD-JUMPER-2-NC_BY_PASTE_NO_SILK]  52.83,85.34 90 top
JP21  VEE-GND  [PAD-JUMPER-2-NC_BY_PASTE_NO_SILK]  66.04,85.34 90 top
JP22  VEE-GND  [PAD-JUMPER-2-NC_BY_PASTE_NO_SILK]  79.25,85.34 90 top
JP23  VEE-GND  [PAD-JUMPER-2-NC_BY_PASTE_NO_SILK]  92.46,85.34 90 top
JP24  VEE-GND  [PAD-JUMPER-2-NC_BY_PASTE_NO_SILK]  105.66,85.34 90 top
JP25  VEE-GND  [PAD-JUMPER-2-NC_BY_PASTE_NO_SILK]  13.21,113.79 90 top
JP26  VEE-GND  [PAD-JUMPER-2-NC_BY_PASTE_NO_SILK]  26.42,113.79 90 top
JP27  VEE-GND  [PAD-JUMPER-2-NC_BY_PASTE_NO_SILK]  39.62,113.79 90 top
JP28  VEE-GND  [PAD-JUMPER-2-NC_BY_PASTE_NO_SILK]  52.83,113.79 90 top
JP29  VEE-GND  [PAD-JUMPER-2-NC_BY_PASTE_NO_SILK]  66.04,113.79 90 top
JP30  VEE-GND  [PAD-JUMPER-2-NC_BY_PASTE_NO_SILK]  79.25,113.79 90 top
JP31  VEE-GND  [PAD-JUMPER-2-NC_BY_PASTE_NO_SILK]  92.46,113.79 90 top
JP32  VEE-GND  [PAD-JUMPER-2-NC_BY_PASTE_NO_SILK]  105.66,113.79 90 top
JP33  VEE-GND  [PAD-JUMPER-2-NC_BY_PASTE_NO_SILK]  13.21,142.24 90 top
JP34  VEE-GND  [PAD-JUMPER-2-NC_BY_PASTE_NO_SILK]  26.42,142.24 90 top
JP35  VEE-GND  [PAD-JUMPER-2-NC_BY_PASTE_NO_SILK]  39.62,142.24 90 top
JP36  VEE-GND  [PAD-JUMPER-2-NC_BY_PASTE_NO_SILK]  52.83,142.24 90 top
JP37  VEE-GND  [PAD-JUMPER-2-NC_BY_PASTE_NO_SILK]  66.04,142.24 90 top
JP38  VEE-GND  [PAD-JUMPER-2-NC_BY_PASTE_NO_SILK]  79.25,142.24 90 top
JP39  VEE-GND  [PAD-JUMPER-2-NC_BY_PASTE_NO_SILK]  92.46,142.24 90 top
JP40  VEE-GND  [PAD-JUMPER-2-NC_BY_PASTE_NO_SILK]  105.66,142.24 90 top
JP41  VEE-GND  [PAD-JUMPER-2-NC_BY_PASTE_NO_SILK]  13.21,170.69 90 top
JP42  VEE-GND  [PAD-JUMPER-2-NC_BY_PASTE_NO_SILK]  26.42,170.69 90 top
JP43  VEE-GND  [PAD-JUMPER-2-NC_BY_PASTE_NO_SILK]  39.62,170.69 90 top
JP44  VEE-GND  [PAD-JUMPER-2-NC_BY_PASTE_NO_SILK]  52.83,170.69 90 top
JP45  VEE-GND  [PAD-JUMPER-2-NC_BY_PASTE_NO_SILK]  66.04,170.69 90 top
JP46  VEE-GND  [PAD-JUMPER-2-NC_BY_PASTE_NO_SILK]  79.25,170.69 90 top
JP47  VEE-GND  [PAD-JUMPER-2-NC_BY_PASTE_NO_SILK]  92.46,170.69 90 top
JP48  VEE-GND  [PAD-JUMPER-2-NC_BY_PASTE_NO_SILK]  105.66,170.69 90 top
JP49  VEE-GND  [PAD-JUMPER-2-NC_BY_PASTE_NO_SILK]  13.21,199.14 90 top
JP50  VEE-GND  [PAD-JUMPER-2-NC_BY_PASTE_NO_SILK]  26.42,199.14 90 top
JP51  VEE-GND  [PAD-JUMPER-2-NC_BY_PASTE_NO_SILK]  39.62,199.14 90 top
JP52  VEE-GND  [PAD-JUMPER-2-NC_BY_PASTE_NO_SILK]  52.83,199.14 90 top
JP53  VEE-GND  [PAD-JUMPER-2-NC_BY_PASTE_NO_SILK]  66.04,199.14 90 top
JP54  VEE-GND  [PAD-JUMPER-2-NC_BY_PASTE_NO_SILK]  79.25,199.14 90 top
JP55  VEE-GND  [PAD-JUMPER-2-NC_BY_PASTE_NO_SILK]  92.46,199.14 90 top
JP56  VEE-GND  [PAD-JUMPER-2-NC_BY_PASTE_NO_SILK]  105.66,199.14 90 top
JP57  VEE-GND  [PAD-JUMPER-2-NC_BY_PASTE_NO_SILK]  13.21,227.58 90 top
JP58  VEE-GND  [PAD-JUMPER-2-NC_BY_PASTE_NO_SILK]  26.42,227.58 90 top
JP59  VEE-GND  [PAD-JUMPER-2-NC_BY_PASTE_NO_SILK]  39.62,227.58 90 top
JP60  VEE-GND  [PAD-JUMPER-2-NC_BY_PASTE_NO_SILK]  52.83,227.58 90 top
JP61  VEE-GND  [PAD-JUMPER-2-NC_BY_PASTE_NO_SILK]  66.04,227.58 90 top
JP62  VEE-GND  [PAD-JUMPER-2-NC_BY_PASTE_NO_SILK]  79.25,227.58 90 top
JP63  VEE-GND  [PAD-JUMPER-2-NC_BY_PASTE_NO_SILK]  92.46,227.58 90 top
JP64  VEE-GND  [PAD-JUMPER-2-NC_BY_PASTE_NO_SILK]  105.66,227.58 90 top
LOGO1  SFE_LOGO_FLAME.1_INCH  [SFE_LOGO_FLAME_.1]  10.9,32.08 90 top
LOGO2  OSHW-LOGOMINI  [OSHW-LOGO-MINI]  9.4,9.4 90 top
LOGO3  SFE_LOGO_NAME.1_INCH  [SFE_LOGO_NAME_.1]  12.51,10.79 90 bottom
LOGO4  SFE_LOGO_FLAME.1_INCH  [SFE_LOGO_FLAME_.1]  24.1,32.08 90 top
LOGO5  OSHW-LOGOMINI  [OSHW-LOGO-MINI]  22.61,9.4 90 top
LOGO6  SFE_LOGO_NAME.1_INCH  [SFE_LOGO_NAME_.1]  25.72,10.79 90 bottom
LOGO7  SFE_LOGO_FLAME.1_INCH  [SFE_LOGO_FLAME_.1]  37.31,32.08 90 top
LOGO8  OSHW-LOGOMINI  [OSHW-LOGO-MINI]  35.81,9.4 90 top
LOGO9  SFE_LOGO_NAME.1_INCH  [SFE_LOGO_NAME_.1]  38.93,10.79 90 bottom
LOGO10  SFE_LOGO_FLAME.1_INCH  [SFE_LOGO_FLAME_.1]  50.52,32.08 90 top
LOGO11  OSHW-LOGOMINI  [OSHW-LOGO-MINI]  49.02,9.4 90 top
LOGO12  SFE_LOGO_NAME.1_INCH  [SFE_LOGO_NAME_.1]  52.13,10.79 90 bottom
LOGO13  SFE_LOGO_FLAME.1_INCH  [SFE_LOGO_FLAME_.1]  63.73,32.08 90 top
LOGO14  OSHW-LOGOMINI  [OSHW-LOGO-MINI]  62.23,9.4 90 top
LOGO15  SFE_LOGO_NAME.1_INCH  [SFE_LOGO_NAME_.1]  65.34,10.79 90 bottom
LOGO16  SFE_LOGO_FLAME.1_INCH  [SFE_LOGO_FLAME_.1]  76.94,32.08 90 top
LOGO17  OSHW-LOGOMINI  [OSHW-LOGO-MINI]  75.44,9.4 90 top
LOGO18  SFE_LOGO_NAME.1_INCH  [SFE_LOGO_NAME_.1]  78.55,10.79 90 bottom
LOGO19  SFE_LOGO_FLAME.1_INCH  [SFE_LOGO_FLAME_.1]  90.14,32.08 90 top
LOGO20  OSHW-LOGOMINI  [OSHW-LOGO-MINI]  88.65,9.4 90 top
LOGO21  SFE_LOGO_NAME.1_INCH  [SFE_LOGO_NAME_.1]  91.76,10.79 90 bottom
LOGO22  SFE_LOGO_FLAME.1_INCH  [SFE_LOGO_FLAME_.1]  103.35,32.08 90 top
LOGO23  OSHW-LOGOMINI  [OSHW-LOGO-MINI]  101.85,9.4 90 top
LOGO24  SFE_LOGO_NAME.1_INCH  [SFE_LOGO_NAME_.1]  104.97,10.79 90 bottom
LOGO25  SFE_LOGO_FLAME.1_INCH  [SFE_LOGO_FLAME_.1]  10.9,60.53 90 top
LOGO26  OSHW-LOGOMINI  [OSHW-LOGO-MINI]  9.4,37.85 90 top
LOGO27  SFE_LOGO_NAME.1_INCH  [SFE_LOGO_NAME_.1]  12.51,39.24 90 bottom
LOGO28  SFE_LOGO_FLAME.1_INCH  [SFE_LOGO_FLAME_.1]  24.1,60.53 90 top
LOGO29  OSHW-LOGOMINI  [OSHW-LOGO-MINI]  22.61,37.85 90 top
LOGO30  SFE_LOGO_NAME.1_INCH  [SFE_LOGO_NAME_.1]  25.72,39.24 90 bottom
LOGO31  SFE_LOGO_FLAME.1_INCH  [SFE_LOGO_FLAME_.1]  37.31,60.53 90 top
LOGO32  OSHW-LOGOMINI  [OSHW-LOGO-MINI]  35.81,37.85 90 top
LOGO33  SFE_LOGO_NAME.1_INCH  [SFE_LOGO_NAME_.1]  38.93,39.24 90 bottom
LOGO34  SFE_LOGO_FLAME.1_INCH  [SFE_LOGO_FLAME_.1]  50.52,60.53 90 top
LOGO35  OSHW-LOGOMINI  [OSHW-LOGO-MINI]  49.02,37.85 90 top
LOGO36  SFE_LOGO_NAME.1_INCH  [SFE_LOGO_NAME_.1]  52.13,39.24 90 bottom
LOGO37  SFE_LOGO_FLAME.1_INCH  [SFE_LOGO_FLAME_.1]  63.73,60.53 90 top
LOGO38  OSHW-LOGOMINI  [OSHW-LOGO-MINI]  62.23,37.85 90 top
LOGO39  SFE_LOGO_NAME.1_INCH  [SFE_LOGO_NAME_.1]  65.34,39.24 90 bottom
LOGO40  SFE_LOGO_FLAME.1_INCH  [SFE_LOGO_FLAME_.1]  76.94,60.53 90 top
LOGO41  OSHW-LOGOMINI  [OSHW-LOGO-MINI]  75.44,37.85 90 top
LOGO42  SFE_LOGO_NAME.1_INCH  [SFE_LOGO_NAME_.1]  78.55,39.24 90 bottom
LOGO43  SFE_LOGO_FLAME.1_INCH  [SFE_LOGO_FLAME_.1]  90.14,60.53 90 top
LOGO44  OSHW-LOGOMINI  [OSHW-LOGO-MINI]  88.65,37.85 90 top
LOGO45  SFE_LOGO_NAME.1_INCH  [SFE_LOGO_NAME_.1]  91.76,39.24 90 bottom
LOGO46  SFE_LOGO_FLAME.1_INCH  [SFE_LOGO_FLAME_.1]  103.35,60.53 90 top
LOGO47  OSHW-LOGOMINI  [OSHW-LOGO-MINI]  101.85,37.85 90 top
LOGO48  SFE_LOGO_NAME.1_INCH  [SFE_LOGO_NAME_.1]  104.97,39.24 90 bottom
LOGO49  SFE_LOGO_FLAME.1_INCH  [SFE_LOGO_FLAME_.1]  10.9,88.98 90 top
LOGO50  OSHW-LOGOMINI  [OSHW-LOGO-MINI]  9.4,66.29 90 top
LOGO51  SFE_LOGO_NAME.1_INCH  [SFE_LOGO_NAME_.1]  12.51,67.69 90 bottom
LOGO52  SFE_LOGO_FLAME.1_INCH  [SFE_LOGO_FLAME_.1]  24.1,88.98 90 top
LOGO53  OSHW-LOGOMINI  [OSHW-LOGO-MINI]  22.61,66.29 90 top
LOGO54  SFE_LOGO_NAME.1_INCH  [SFE_LOGO_NAME_.1]  25.72,67.69 90 bottom
LOGO55  SFE_LOGO_FLAME.1_INCH  [SFE_LOGO_FLAME_.1]  37.31,88.98 90 top
LOGO56  OSHW-LOGOMINI  [OSHW-LOGO-MINI]  35.81,66.29 90 top
LOGO57  SFE_LOGO_NAME.1_INCH  [SFE_LOGO_NAME_.1]  38.93,67.69 90 bottom
LOGO58  SFE_LOGO_FLAME.1_INCH  [SFE_LOGO_FLAME_.1]  50.52,88.98 90 top
LOGO59  OSHW-LOGOMINI  [OSHW-LOGO-MINI]  49.02,66.29 90 top
LOGO60  SFE_LOGO_NAME.1_INCH  [SFE_LOGO_NAME_.1]  52.13,67.69 90 bottom
LOGO61  SFE_LOGO_FLAME.1_INCH  [SFE_LOGO_FLAME_.1]  63.73,88.98 90 top
LOGO62  OSHW-LOGOMINI  [OSHW-LOGO-MINI]  62.23,66.29 90 top
LOGO63  SFE_LOGO_NAME.1_INCH  [SFE_LOGO_NAME_.1]  65.34,67.69 90 bottom
LOGO64  SFE_LOGO_FLAME.1_INCH  [SFE_LOGO_FLAME_.1]  76.94,88.98 90 top
LOGO65  OSHW-LOGOMINI  [OSHW-LOGO-MINI]  75.44,66.29 90 top
LOGO66  SFE_LOGO_NAME.1_INCH  [SFE_LOGO_NAME_.1]  78.55,67.69 90 bottom
LOGO67  SFE_LOGO_FLAME.1_INCH  [SFE_LOGO_FLAME_.1]  90.14,88.98 90 top
LOGO68  OSHW-LOGOMINI  [OSHW-LOGO-MINI]  88.65,66.29 90 top
LOGO69  SFE_LOGO_NAME.1_INCH  [SFE_LOGO_NAME_.1]  91.76,67.69 90 bottom
LOGO70  SFE_LOGO_FLAME.1_INCH  [SFE_LOGO_FLAME_.1]  103.35,88.98 90 top
LOGO71  OSHW-LOGOMINI  [OSHW-LOGO-MINI]  101.85,66.29 90 top
LOGO72  SFE_LOGO_NAME.1_INCH  [SFE_LOGO_NAME_.1]  104.97,67.69 90 bottom
LOGO73  SFE_LOGO_FLAME.1_INCH  [SFE_LOGO_FLAME_.1]  10.9,117.42 90 top
LOGO74  OSHW-LOGOMINI  [OSHW-LOGO-MINI]  9.4,94.74 90 top
LOGO75  SFE_LOGO_NAME.1_INCH  [SFE_LOGO_NAME_.1]  12.51,96.14 90 bottom
LOGO76  SFE_LOGO_FLAME.1_INCH  [SFE_LOGO_FLAME_.1]  24.1,117.42 90 top
LOGO77  OSHW-LOGOMINI  [OSHW-LOGO-MINI]  22.61,94.74 90 top
LOGO78  SFE_LOGO_NAME.1_INCH  [SFE_LOGO_NAME_.1]  25.72,96.14 90 bottom
LOGO79  SFE_LOGO_FLAME.1_INCH  [SFE_LOGO_FLAME_.1]  37.31,117.42 90 top
LOGO80  OSHW-LOGOMINI  [OSHW-LOGO-MINI]  35.81,94.74 90 top
LOGO81  SFE_LOGO_NAME.1_INCH  [SFE_LOGO_NAME_.1]  38.93,96.14 90 bottom
LOGO82  SFE_LOGO_FLAME.1_INCH  [SFE_LOGO_FLAME_.1]  50.52,117.42 90 top
LOGO83  OSHW-LOGOMINI  [OSHW-LOGO-MINI]  49.02,94.74 90 top
LOGO84  SFE_LOGO_NAME.1_INCH  [SFE_LOGO_NAME_.1]  52.13,96.14 90 bottom
LOGO85  SFE_LOGO_FLAME.1_INCH  [SFE_LOGO_FLAME_.1]  63.73,117.42 90 top
LOGO86  OSHW-LOGOMINI  [OSHW-LOGO-MINI]  62.23,94.74 90 top
LOGO87  SFE_LOGO_NAME.1_INCH  [SFE_LOGO_NAME_.1]  65.34,96.14 90 bottom
LOGO88  SFE_LOGO_FLAME.1_INCH  [SFE_LOGO_FLAME_.1]  76.94,117.42 90 top
LOGO89  OSHW-LOGOMINI  [OSHW-LOGO-MINI]  75.44,94.74 90 top
LOGO90  SFE_LOGO_NAME.1_INCH  [SFE_LOGO_NAME_.1]  78.55,96.14 90 bottom
LOGO91  SFE_LOGO_FLAME.1_INCH  [SFE_LOGO_FLAME_.1]  90.14,117.42 90 top
LOGO92  OSHW-LOGOMINI  [OSHW-LOGO-MINI]  88.65,94.74 90 top
LOGO93  SFE_LOGO_NAME.1_INCH  [SFE_LOGO_NAME_.1]  91.76,96.14 90 bottom
LOGO94  SFE_LOGO_FLAME.1_INCH  [SFE_LOGO_FLAME_.1]  103.35,117.42 90 top
LOGO95  OSHW-LOGOMINI  [OSHW-LOGO-MINI]  101.85,94.74 90 top
LOGO96  SFE_LOGO_NAME.1_INCH  [SFE_LOGO_NAME_.1]  104.97,96.14 90 bottom
LOGO97  SFE_LOGO_FLAME.1_INCH  [SFE_LOGO_FLAME_.1]  10.9,145.87 90 top
LOGO98  OSHW-LOGOMINI  [OSHW-LOGO-MINI]  9.4,123.19 90 top
LOGO99  SFE_LOGO_NAME.1_INCH  [SFE_LOGO_NAME_.1]  12.51,124.59 90 bottom
LOGO100  SFE_LOGO_FLAME.1_INCH  [SFE_LOGO_FLAME_.1]  24.1,145.87 90 top
LOGO101  OSHW-LOGOMINI  [OSHW-LOGO-MINI]  22.61,123.19 90 top
LOGO102  SFE_LOGO_NAME.1_INCH  [SFE_LOGO_NAME_.1]  25.72,124.59 90 bottom
LOGO103  SFE_LOGO_FLAME.1_INCH  [SFE_LOGO_FLAME_.1]  37.31,145.87 90 top
LOGO104  OSHW-LOGOMINI  [OSHW-LOGO-MINI]  35.81,123.19 90 top
LOGO105  SFE_LOGO_NAME.1_INCH  [SFE_LOGO_NAME_.1]  38.93,124.59 90 bottom
LOGO106  SFE_LOGO_FLAME.1_INCH  [SFE_LOGO_FLAME_.1]  50.52,145.87 90 top
LOGO107  OSHW-LOGOMINI  [OSHW-LOGO-MINI]  49.02,123.19 90 top
LOGO108  SFE_LOGO_NAME.1_INCH  [SFE_LOGO_NAME_.1]  52.13,124.59 90 bottom
LOGO109  SFE_LOGO_FLAME.1_INCH  [SFE_LOGO_FLAME_.1]  63.73,145.87 90 top
LOGO110  OSHW-LOGOMINI  [OSHW-LOGO-MINI]  62.23,123.19 90 top
LOGO111  SFE_LOGO_NAME.1_INCH  [SFE_LOGO_NAME_.1]  65.34,124.59 90 bottom
LOGO112  SFE_LOGO_FLAME.1_INCH  [SFE_LOGO_FLAME_.1]  76.94,145.87 90 top
LOGO113  OSHW-LOGOMINI  [OSHW-LOGO-MINI]  75.44,123.19 90 top
LOGO114  SFE_LOGO_NAME.1_INCH  [SFE_LOGO_NAME_.1]  78.55,124.59 90 bottom
LOGO115  SFE_LOGO_FLAME.1_INCH  [SFE_LOGO_FLAME_.1]  90.14,145.87 90 top
LOGO116  OSHW-LOGOMINI  [OSHW-LOGO-MINI]  88.65,123.19 90 top
LOGO117  SFE_LOGO_NAME.1_INCH  [SFE_LOGO_NAME_.1]  91.76,124.59 90 bottom
LOGO118  SFE_LOGO_FLAME.1_INCH  [SFE_LOGO_FLAME_.1]  103.35,145.87 90 top
LOGO119  OSHW-LOGOMINI  [OSHW-LOGO-MINI]  101.85,123.19 90 top
LOGO120  SFE_LOGO_NAME.1_INCH  [SFE_LOGO_NAME_.1]  104.97,124.59 90 bottom
LOGO121  SFE_LOGO_FLAME.1_INCH  [SFE_LOGO_FLAME_.1]  10.9,174.32 90 top
LOGO122  OSHW-LOGOMINI  [OSHW-LOGO-MINI]  9.4,151.64 90 top
LOGO123  SFE_LOGO_NAME.1_INCH  [SFE_LOGO_NAME_.1]  12.51,153.03 90 bottom
LOGO124  SFE_LOGO_FLAME.1_INCH  [SFE_LOGO_FLAME_.1]  24.1,174.32 90 top
LOGO125  OSHW-LOGOMINI  [OSHW-LOGO-MINI]  22.61,151.64 90 top
LOGO126  SFE_LOGO_NAME.1_INCH  [SFE_LOGO_NAME_.1]  25.72,153.03 90 bottom
LOGO127  SFE_LOGO_FLAME.1_INCH  [SFE_LOGO_FLAME_.1]  37.31,174.32 90 top
LOGO128  OSHW-LOGOMINI  [OSHW-LOGO-MINI]  35.81,151.64 90 top
LOGO129  SFE_LOGO_NAME.1_INCH  [SFE_LOGO_NAME_.1]  38.93,153.03 90 bottom
LOGO130  SFE_LOGO_FLAME.1_INCH  [SFE_LOGO_FLAME_.1]  50.52,174.32 90 top
LOGO131  OSHW-LOGOMINI  [OSHW-LOGO-MINI]  49.02,151.64 90 top
LOGO132  SFE_LOGO_NAME.1_INCH  [SFE_LOGO_NAME_.1]  52.13,153.03 90 bottom
LOGO133  SFE_LOGO_FLAME.1_INCH  [SFE_LOGO_FLAME_.1]  63.73,174.32 90 top
LOGO134  OSHW-LOGOMINI  [OSHW-LOGO-MINI]  62.23,151.64 90 top
LOGO135  SFE_LOGO_NAME.1_INCH  [SFE_LOGO_NAME_.1]  65.34,153.03 90 bottom
LOGO136  SFE_LOGO_FLAME.1_INCH  [SFE_LOGO_FLAME_.1]  76.94,174.32 90 top
LOGO137  OSHW-LOGOMINI  [OSHW-LOGO-MINI]  75.44,151.64 90 top
LOGO138  SFE_LOGO_NAME.1_INCH  [SFE_LOGO_NAME_.1]  78.55,153.03 90 bottom
LOGO139  SFE_LOGO_FLAME.1_INCH  [SFE_LOGO_FLAME_.1]  90.14,174.32 90 top
LOGO140  OSHW-LOGOMINI  [OSHW-LOGO-MINI]  88.65,151.64 90 top
LOGO141  SFE_LOGO_NAME.1_INCH  [SFE_LOGO_NAME_.1]  91.76,153.03 90 bottom
LOGO142  SFE_LOGO_FLAME.1_INCH  [SFE_LOGO_FLAME_.1]  103.35,174.32 90 top
LOGO143  OSHW-LOGOMINI  [OSHW-LOGO-MINI]  101.85,151.64 90 top
LOGO144  SFE_LOGO_NAME.1_INCH  [SFE_LOGO_NAME_.1]  104.97,153.03 90 bottom
LOGO145  SFE_LOGO_FLAME.1_INCH  [SFE_LOGO_FLAME_.1]  10.9,202.77 90 top
LOGO146  OSHW-LOGOMINI  [OSHW-LOGO-MINI]  9.4,180.09 90 top
LOGO147  SFE_LOGO_NAME.1_INCH  [SFE_LOGO_NAME_.1]  12.51,181.48 90 bottom
LOGO148  SFE_LOGO_FLAME.1_INCH  [SFE_LOGO_FLAME_.1]  24.1,202.77 90 top
LOGO149  OSHW-LOGOMINI  [OSHW-LOGO-MINI]  22.61,180.09 90 top
LOGO150  SFE_LOGO_NAME.1_INCH  [SFE_LOGO_NAME_.1]  25.72,181.48 90 bottom
LOGO151  SFE_LOGO_FLAME.1_INCH  [SFE_LOGO_FLAME_.1]  37.31,202.77 90 top
LOGO152  OSHW-LOGOMINI  [OSHW-LOGO-MINI]  35.81,180.09 90 top
LOGO153  SFE_LOGO_NAME.1_INCH  [SFE_LOGO_NAME_.1]  38.93,181.48 90 bottom
LOGO154  SFE_LOGO_FLAME.1_INCH  [SFE_LOGO_FLAME_.1]  50.52,202.77 90 top
LOGO155  OSHW-LOGOMINI  [OSHW-LOGO-MINI]  49.02,180.09 90 top
LOGO156  SFE_LOGO_NAME.1_INCH  [SFE_LOGO_NAME_.1]  52.13,181.48 90 bottom
LOGO157  SFE_LOGO_FLAME.1_INCH  [SFE_LOGO_FLAME_.1]  63.73,202.77 90 top
LOGO158  OSHW-LOGOMINI  [OSHW-LOGO-MINI]  62.23,180.09 90 top
LOGO159  SFE_LOGO_NAME.1_INCH  [SFE_LOGO_NAME_.1]  65.34,181.48 90 bottom
LOGO160  SFE_LOGO_FLAME.1_INCH  [SFE_LOGO_FLAME_.1]  76.94,202.77 90 top
LOGO161  OSHW-LOGOMINI  [OSHW-LOGO-MINI]  75.44,180.09 90 top
LOGO162  SFE_LOGO_NAME.1_INCH  [SFE_LOGO_NAME_.1]  78.55,181.48 90 bottom
LOGO163  SFE_LOGO_FLAME.1_INCH  [SFE_LOGO_FLAME_.1]  90.14,202.77 90 top
LOGO164  OSHW-LOGOMINI  [OSHW-LOGO-MINI]  88.65,180.09 90 top
LOGO165  SFE_LOGO_NAME.1_INCH  [SFE_LOGO_NAME_.1]  91.76,181.48 90 bottom
LOGO166  SFE_LOGO_FLAME.1_INCH  [SFE_LOGO_FLAME_.1]  103.35,202.77 90 top
LOGO167  OSHW-LOGOMINI  [OSHW-LOGO-MINI]  101.85,180.09 90 top
LOGO168  SFE_LOGO_NAME.1_INCH  [SFE_LOGO_NAME_.1]  104.97,181.48 90 bottom
LOGO169  SFE_LOGO_FLAME.1_INCH  [SFE_LOGO_FLAME_.1]  10.9,231.22 90 top
LOGO170  OSHW-LOGOMINI  [OSHW-LOGO-MINI]  9.4,208.53 90 top
LOGO171  SFE_LOGO_NAME.1_INCH  [SFE_LOGO_NAME_.1]  12.51,209.93 90 bottom
LOGO172  SFE_LOGO_FLAME.1_INCH  [SFE_LOGO_FLAME_.1]  24.1,231.22 90 top
LOGO173  OSHW-LOGOMINI  [OSHW-LOGO-MINI]  22.61,208.53 90 top
LOGO174  SFE_LOGO_NAME.1_INCH  [SFE_LOGO_NAME_.1]  25.72,209.93 90 bottom
LOGO175  SFE_LOGO_FLAME.1_INCH  [SFE_LOGO_FLAME_.1]  37.31,231.22 90 top
LOGO176  OSHW-LOGOMINI  [OSHW-LOGO-MINI]  35.81,208.53 90 top
LOGO177  SFE_LOGO_NAME.1_INCH  [SFE_LOGO_NAME_.1]  38.93,209.93 90 bottom
LOGO178  SFE_LOGO_FLAME.1_INCH  [SFE_LOGO_FLAME_.1]  50.52,231.22 90 top
LOGO179  OSHW-LOGOMINI  [OSHW-LOGO-MINI]  49.02,208.53 90 top
LOGO180  SFE_LOGO_NAME.1_INCH  [SFE_LOGO_NAME_.1]  52.13,209.93 90 bottom
LOGO181  SFE_LOGO_FLAME.1_INCH  [SFE_LOGO_FLAME_.1]  63.73,231.22 90 top
LOGO182  OSHW-LOGOMINI  [OSHW-LOGO-MINI]  62.23,208.53 90 top
LOGO183  SFE_LOGO_NAME.1_INCH  [SFE_LOGO_NAME_.1]  65.34,209.93 90 bottom
LOGO184  SFE_LOGO_FLAME.1_INCH  [SFE_LOGO_FLAME_.1]  76.94,231.22 90 top
LOGO185  OSHW-LOGOMINI  [OSHW-LOGO-MINI]  75.44,208.53 90 top
LOGO186  SFE_LOGO_NAME.1_INCH  [SFE_LOGO_NAME_.1]  78.55,209.93 90 bottom
LOGO187  SFE_LOGO_FLAME.1_INCH  [SFE_LOGO_FLAME_.1]  90.14,231.22 90 top
LOGO188  OSHW-LOGOMINI  [OSHW-LOGO-MINI]  88.65,208.53 90 top
LOGO189  SFE_LOGO_NAME.1_INCH  [SFE_LOGO_NAME_.1]  91.76,209.93 90 bottom
LOGO190  SFE_LOGO_FLAME.1_INCH  [SFE_LOGO_FLAME_.1]  103.35,231.22 90 top
LOGO191  OSHW-LOGOMINI  [OSHW-LOGO-MINI]  101.85,208.53 90 top
LOGO192  SFE_LOGO_NAME.1_INCH  [SFE_LOGO_NAME_.1]  104.97,209.93 90 bottom
R1  10k  [0603]  13.21,14.48 0 top
R2  10k  [0603]  26.42,14.48 0 top
R3  10k  [0603]  39.62,14.48 0 top
R4  10k  [0603]  52.83,14.48 0 top
R5  10k  [0603]  66.04,14.48 0 top
R6  10k  [0603]  79.25,14.48 0 top
R7  10k  [0603]  92.46,14.48 0 top
R8  10k  [0603]  105.66,14.48 0 top
R9  10k  [0603]  13.21,42.93 0 top
R10  10k  [0603]  26.42,42.93 0 top
R11  10k  [0603]  39.62,42.93 0 top
R12  10k  [0603]  52.83,42.93 0 top
R13  10k  [0603]  66.04,42.93 0 top
R14  10k  [0603]  79.25,42.93 0 top
R15  10k  [0603]  92.46,42.93 0 top
R16  10k  [0603]  105.66,42.93 0 top
R17  10k  [0603]  13.21,71.37 0 top
R18  10k  [0603]  26.42,71.37 0 top
R19  10k  [0603]  39.62,71.37 0 top
R20  10k  [0603]  52.83,71.37 0 top
R21  10k  [0603]  66.04,71.37 0 top
R22  10k  [0603]  79.25,71.37 0 top
R23  10k  [0603]  92.46,71.37 0 top
R24  10k  [0603]  105.66,71.37 0 top
R25  10k  [0603]  13.21,99.82 0 top
R26  10k  [0603]  26.42,99.82 0 top
R27  10k  [0603]  39.62,99.82 0 top
R28  10k  [0603]  52.83,99.82 0 top
R29  10k  [0603]  66.04,99.82 0 top
R30  10k  [0603]  79.25,99.82 0 top
R31  10k  [0603]  92.46,99.82 0 top
R32  10k  [0603]  105.66,99.82 0 top
R33  10k  [0603]  13.21,128.27 0 top
R34  10k  [0603]  26.42,128.27 0 top
R35  10k  [0603]  39.62,128.27 0 top
R36  10k  [0603]  52.83,128.27 0 top
R37  10k  [0603]  66.04,128.27 0 top
R38  10k  [0603]  79.25,128.27 0 top
R39  10k  [0603]  92.46,128.27 0 top
R40  10k  [0603]  105.66,128.27 0 top
R41  10k  [0603]  13.21,156.72 0 top
R42  10k  [0603]  26.42,156.72 0 top
R43  10k  [0603]  39.62,156.72 0 top
R44  10k  [0603]  52.83,156.72 0 top
R45  10k  [0603]  66.04,156.72 0 top
R46  10k  [0603]  79.25,156.72 0 top
R47  10k  [0603]  92.46,156.72 0 top
R48  10k  [0603]  105.66,156.72 0 top
R49  10k  [0603]  13.21,185.17 0 top
R50  10k  [0603]  26.42,185.17 0 top
R51  10k  [0603]  39.62,185.17 0 top
R52  10k  [0603]  52.83,185.17 0 top
R53  10k  [0603]  66.04,185.17 0 top
R54  10k  [0603]  79.25,185.17 0 top
R55  10k  [0603]  92.46,185.17 0 top
R56  10k  [0603]  105.66,185.17 0 top
R57  10k  [0603]  13.21,213.61 0 top
R58  10k  [0603]  26.42,213.61 0 top
R59  10k  [0603]  39.62,213.61 0 top
R60  10k  [0603]  52.83,213.61 0 top
R61  10k  [0603]  66.04,213.61 0 top
R62  10k  [0603]  79.25,213.61 0 top
R63  10k  [0603]  92.46,213.61 0 top
R64  10k  [0603]  105.66,213.61 0 top
U1  74HC4051BQ  [DHVQFN-16-2.5X3.5MM]  13.21,20.83 270 top
U2  74HC4051BQ  [DHVQFN-16-2.5X3.5MM]  26.42,20.83 270 top
U3  74HC4051BQ  [DHVQFN-16-2.5X3.5MM]  39.62,20.83 270 top
U4  74HC4051BQ  [DHVQFN-16-2.5X3.5MM]  52.83,20.83 270 top
U5  74HC4051BQ  [DHVQFN-16-2.5X3.5MM]  66.04,20.83 270 top
U6  74HC4051BQ  [DHVQFN-16-2.5X3.5MM]  79.25,20.83 270 top
U7  74HC4051BQ  [DHVQFN-16-2.5X3.5MM]  92.46,20.83 270 top
U8  74HC4051BQ  [DHVQFN-16-2.5X3.5MM]  105.66,20.83 270 top
U9  74HC4051BQ  [DHVQFN-16-2.5X3.5MM]  13.21,49.28 270 top
U10  74HC4051BQ  [DHVQFN-16-2.5X3.5MM]  26.42,49.28 270 top
U11  74HC4051BQ  [DHVQFN-16-2.5X3.5MM]  39.62,49.28 270 top
U12  74HC4051BQ  [DHVQFN-16-2.5X3.5MM]  52.83,49.28 270 top
U13  74HC4051BQ  [DHVQFN-16-2.5X3.5MM]  66.04,49.28 270 top
U14  74HC4051BQ  [DHVQFN-16-2.5X3.5MM]  79.25,49.28 270 top
U15  74HC4051BQ  [DHVQFN-16-2.5X3.5MM]  92.46,49.28 270 top
U16  74HC4051BQ  [DHVQFN-16-2.5X3.5MM]  105.66,49.28 270 top
U17  74HC4051BQ  [DHVQFN-16-2.5X3.5MM]  13.21,77.72 270 top
U18  74HC4051BQ  [DHVQFN-16-2.5X3.5MM]  26.42,77.72 270 top
U19  74HC4051BQ  [DHVQFN-16-2.5X3.5MM]  39.62,77.72 270 top
U20  74HC4051BQ  [DHVQFN-16-2.5X3.5MM]  52.83,77.72 270 top
U21  74HC4051BQ  [DHVQFN-16-2.5X3.5MM]  66.04,77.72 270 top
U22  74HC4051BQ  [DHVQFN-16-2.5X3.5MM]  79.25,77.72 270 top
U23  74HC4051BQ  [DHVQFN-16-2.5X3.5MM]  92.46,77.72 270 top
U24  74HC4051BQ  [DHVQFN-16-2.5X3.5MM]  105.66,77.72 270 top
U25  74HC4051BQ  [DHVQFN-16-2.5X3.5MM]  13.21,106.17 270 top
U26  74HC4051BQ  [DHVQFN-16-2.5X3.5MM]  26.42,106.17 270 top
U27  74HC4051BQ  [DHVQFN-16-2.5X3.5MM]  39.62,106.17 270 top
U28  74HC4051BQ  [DHVQFN-16-2.5X3.5MM]  52.83,106.17 270 top
U29  74HC4051BQ  [DHVQFN-16-2.5X3.5MM]  66.04,106.17 270 top
U30  74HC4051BQ  [DHVQFN-16-2.5X3.5MM]  79.25,106.17 270 top
U31  74HC4051BQ  [DHVQFN-16-2.5X3.5MM]  92.46,106.17 270 top
U32  74HC4051BQ  [DHVQFN-16-2.5X3.5MM]  105.66,106.17 270 top
U33  74HC4051BQ  [DHVQFN-16-2.5X3.5MM]  13.21,134.62 270 top
U34  74HC4051BQ  [DHVQFN-16-2.5X3.5MM]  26.42,134.62 270 top
U35  74HC4051BQ  [DHVQFN-16-2.5X3.5MM]  39.62,134.62 270 top
U36  74HC4051BQ  [DHVQFN-16-2.5X3.5MM]  52.83,134.62 270 top
U37  74HC4051BQ  [DHVQFN-16-2.5X3.5MM]  66.04,134.62 270 top
U38  74HC4051BQ  [DHVQFN-16-2.5X3.5MM]  79.25,134.62 270 top
U39  74HC4051BQ  [DHVQFN-16-2.5X3.5MM]  92.46,134.62 270 top
U40  74HC4051BQ  [DHVQFN-16-2.5X3.5MM]  105.66,134.62 270 top
U41  74HC4051BQ  [DHVQFN-16-2.5X3.5MM]  13.21,163.07 270 top
U42  74HC4051BQ  [DHVQFN-16-2.5X3.5MM]  26.42,163.07 270 top
U43  74HC4051BQ  [DHVQFN-16-2.5X3.5MM]  39.62,163.07 270 top
U44  74HC4051BQ  [DHVQFN-16-2.5X3.5MM]  52.83,163.07 270 top
U45  74HC4051BQ  [DHVQFN-16-2.5X3.5MM]  66.04,163.07 270 top
U46  74HC4051BQ  [DHVQFN-16-2.5X3.5MM]  79.25,163.07 270 top
U47  74HC4051BQ  [DHVQFN-16-2.5X3.5MM]  92.46,163.07 270 top
U48  74HC4051BQ  [DHVQFN-16-2.5X3.5MM]  105.66,163.07 270 top
U49  74HC4051BQ  [DHVQFN-16-2.5X3.5MM]  13.21,191.52 270 top
U50  74HC4051BQ  [DHVQFN-16-2.5X3.5MM]  26.42,191.52 270 top
U51  74HC4051BQ  [DHVQFN-16-2.5X3.5MM]  39.62,191.52 270 top
U52  74HC4051BQ  [DHVQFN-16-2.5X3.5MM]  52.83,191.52 270 top
U53  74HC4051BQ  [DHVQFN-16-2.5X3.5MM]  66.04,191.52 270 top
U54  74HC4051BQ  [DHVQFN-16-2.5X3.5MM]  79.25,191.52 270 top
U55  74HC4051BQ  [DHVQFN-16-2.5X3.5MM]  92.46,191.52 270 top
U56  74HC4051BQ  [DHVQFN-16-2.5X3.5MM]  105.66,191.52 270 top
U57  74HC4051BQ  [DHVQFN-16-2.5X3.5MM]  13.21,219.96 270 top
U58  74HC4051BQ  [DHVQFN-16-2.5X3.5MM]  26.42,219.96 270 top
U59  74HC4051BQ  [DHVQFN-16-2.5X3.5MM]  39.62,219.96 270 top
U60  74HC4051BQ  [DHVQFN-16-2.5X3.5MM]  52.83,219.96 270 top
U61  74HC4051BQ  [DHVQFN-16-2.5X3.5MM]  66.04,219.96 270 top
U62  74HC4051BQ  [DHVQFN-16-2.5X3.5MM]  79.25,219.96 270 top
U63  74HC4051BQ  [DHVQFN-16-2.5X3.5MM]  92.46,219.96 270 top
U64  74HC4051BQ  [DHVQFN-16-2.5X3.5MM]  105.66,219.96 270 top

## Library data of the parts
C1-C64 = SparkFun-Capacitors; PROD_ID: CAP-00810
E$1 = SparkFun-Retired
E$5 E$7 FD1-FD128 LOGO1-LOGO192 = SparkFun-Aesthetics
H1-H128 = SparkFun-Electromechanical
J1 J3 J5 J7 J9 J11 J13 J15 J17 J19 J21 J23 J25 J27 J29 J31 J33 J35 J37 J39 J41 J43 J45 J47 J49 J51 J53 J55 J57 J59 J61 J63 J65 J67 J69 J71 J73 J75 J77 J79 J81 J83 J85 J87 J89 J91 J93 J95 J97 J99 J101 J103 J105 J107 J109 J111 J113 J115 J117 J119 J121 J123 J125 J127 = SparkFun-Connectors
J2 J4 J6 J8 J10 J12 J14 J16 J18 J20 J22 J24 J26 J28 J30 J32 J34 J36 J38 J40 J42 J44 J46 J48 J50 J52 J54 J56 J58 J60 J62 J64 J66 J68 J70 J72 J74 J76 J78 J80 J82 J84 J86 J88 J90 J92 J94 J96 J98 J100 J102 J104 J106 J108 J110 J112 J114 J116 J118 J120 J122 J124 J126 J128 = SparkFun-Connectors; PROD_ID: CONN-08437
JP1-JP64 = SparkFun-Passives
R1-R64 = SparkFun-Resistors; PROD_ID: RES-00824
U1-U64 = 8mux; PROD_ID: IC-13334